# EAGLE board IR_and_skip_revB (EAGLE 5.11)
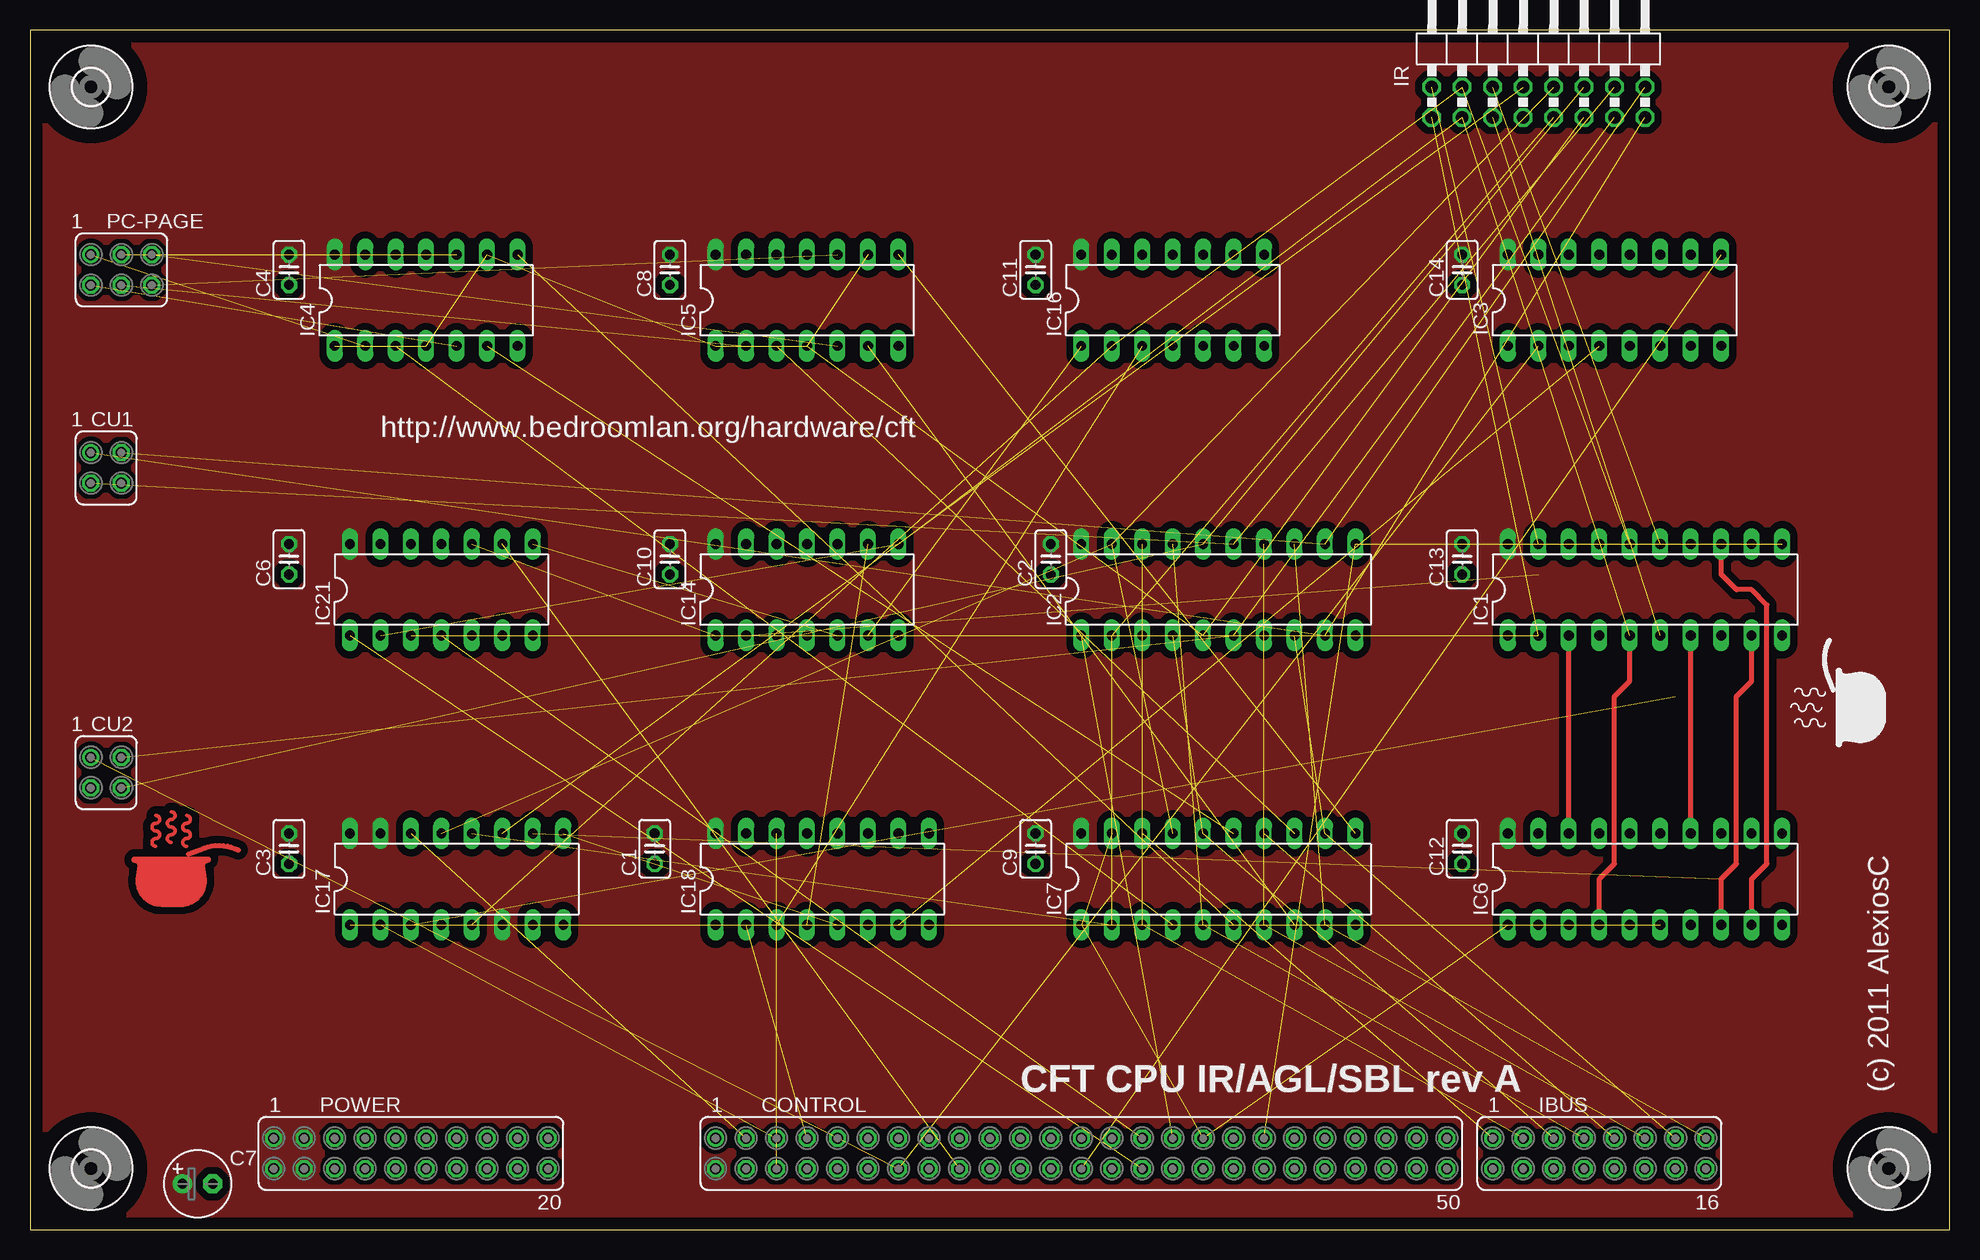
[diagram p0: board, top side]
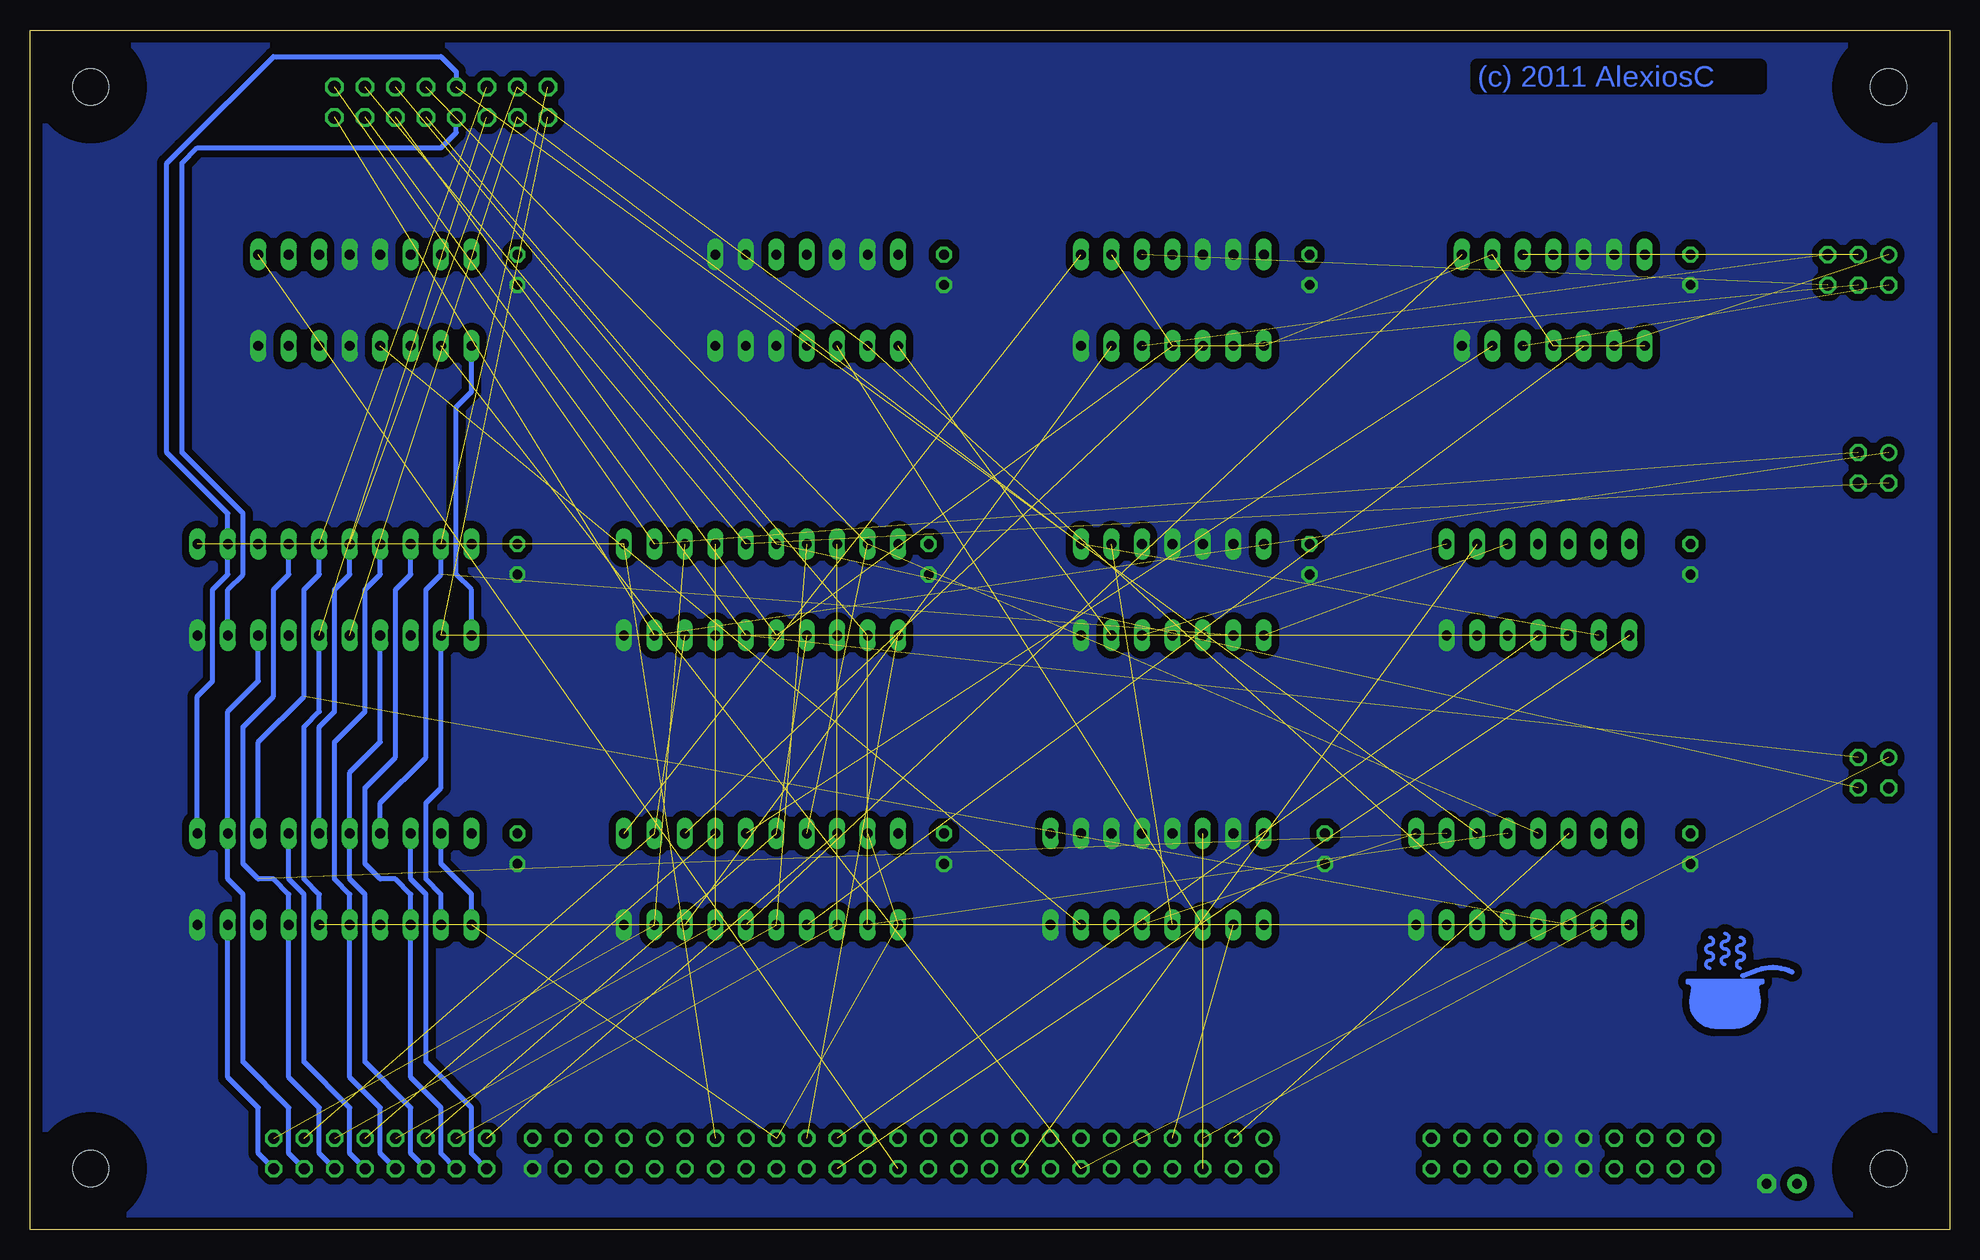
[diagram p1: board, bottom side, seen from below]

Size 160 x 100 mm. Coordinates in mm from the lower left corner, seen from the top.
Outline: 0,0 160,0 160,100 0,100 0,0
Copper layers (1*16): Top 0.035mm / dielectric 1.5mm / Bottom 0.035mm
Design rules "olimex-10mil": minimum track width 10mil, minimum drill 24mil, track to track 10mil, track to pad 10mil, pad to pad 10mil, via to via 10mil, smd to smd 10mil, copper to edge 40mil, drill to drill 10mil, minimum pad ring 10mil, minimum via ring 8mil, stop-mask expansion 0mil, vias tented up to drill 0mil, thermal gap 10mil
Net classes: 0 default: width 0.406 mm, clearance 0.305 mm; 1 Decoupling: width 1.27 mm

## Footprints (pad centres in the part's own frame; a part is rotated, then mirrored left to right if it is on the bottom)
C025-025X050 = drill 0.813 octagon: 1 -1.27,0; 2 1.27,0
E2,5-6 = drill 0.813 pad 1.6 round: + -1.27,0 | drill 0.813 pad 1.6 octagon: - 1.27,0
FE25-2 = drill 0.914 round: 1 -30.48,1.27; 41 20.32,1.27 | drill 0.914 octagon: 2 -30.48,-1.27; 3 -27.94,1.27; 4 -27.94,-1.27; 5 -25.4,1.27; 6 -25.4,-1.27; 7 -22.86,1.27; 8 -22.86,-1.27; 9 -20.32,1.27; 10 -20.32,-1.27; 11 -17.78,1.27; 12 -17.78,-1.27; 13 -15.24,1.27; 14 -15.24,-1.27; 15 -12.7,1.27; 16 -12.7,-1.27; 17 -10.16,1.27; 18 -10.16,-1.27; 19 -7.62,1.27; 20 -7.62,-1.27; 21 -5.08,1.27; 22 -5.08,-1.27; 23 -2.54,1.27; 24 -2.54,-1.27; 25 0,1.27; 26 0,-1.27; 27 2.54,1.27; 28 2.54,-1.27; 29 5.08,1.27; 30 5.08,-1.27; 31 7.62,1.27; 32 7.62,-1.27; 33 10.16,1.27; 34 10.16,-1.27; 35 12.7,1.27; 36 12.7,-1.27; 37 15.24,1.27; 38 15.24,-1.27; 39 17.78,1.27; 40 17.78,-1.27; 42 20.32,-1.27; 43 22.86,1.27; 44 22.86,-1.27; 45 25.4,1.27; 46 25.4,-1.27; 47 27.94,1.27; 48 27.94,-1.27; 49 30.48,1.27; 50 30.48,-1.27
FE02-2 = drill 0.914 round: 1 -1.27,1.27 | drill 0.914 octagon: 2 -1.27,-1.27; 3 1.27,1.27; 4 1.27,-1.27
3,0 = hole 3: 0,0
FE08-2 = drill 0.914 octagon: 1 -8.89,1.27; 2 -8.89,-1.27; 3 -6.35,1.27; 4 -6.35,-1.27; 5 -3.81,1.27; 6 -3.81,-1.27; 7 -1.27,1.27; 8 -1.27,-1.27; 9 1.27,1.27; 10 1.27,-1.27; 11 3.81,1.27; 12 3.81,-1.27; 13 6.35,1.27; 14 6.35,-1.27; 15 8.89,1.27; 16 8.89,-1.27
DIL20 = drill 0.813 long: 1 -11.43,-3.81; 2 -8.89,-3.81; 3 -6.35,-3.81; 4 -3.81,-3.81; 5 -1.27,-3.81; 6 1.27,-3.81; 7 3.81,-3.81; 8 6.35,-3.81; 9 8.89,-3.81; 10 11.43,-3.81; 11 11.43,3.81; 12 8.89,3.81; 13 6.35,3.81; 14 3.81,3.81; 15 1.27,3.81; 16 -1.27,3.81; 17 -3.81,3.81; 18 -6.35,3.81; 19 -8.89,3.81; 20 -11.43,3.81
DIL16 = drill 0.813 long: 1 -8.89,-3.81; 2 -6.35,-3.81; 3 -3.81,-3.81; 4 -1.27,-3.81; 5 1.27,-3.81; 6 3.81,-3.81; 7 6.35,-3.81; 8 8.89,-3.81; 9 8.89,3.81; 10 6.35,3.81; 11 3.81,3.81; 12 1.27,3.81; 13 -1.27,3.81; 14 -3.81,3.81; 15 -6.35,3.81; 16 -8.89,3.81
DIL14 = drill 0.813 long: 1 -7.62,-3.81; 2 -5.08,-3.81; 3 -2.54,-3.81; 4 0,-3.81; 5 2.54,-3.81; 6 5.08,-3.81; 7 7.62,-3.81; 8 7.62,3.81; 9 5.08,3.81; 10 2.54,3.81; 11 0,3.81; 12 -2.54,3.81; 13 -5.08,3.81; 14 -7.62,3.81
2X08/90 = drill 1.016 octagon: 1 -8.89,-6.35; 2 -8.89,-3.81; 3 -6.35,-6.35; 4 -6.35,-3.81; 5 -3.81,-6.35; 6 -3.81,-3.81; 7 -1.27,-6.35; 8 -1.27,-3.81; 9 1.27,-6.35; 10 1.27,-3.81; 11 3.81,-6.35; 12 3.81,-3.81; 13 6.35,-6.35; 14 6.35,-3.81; 15 8.89,-6.35; 16 8.89,-3.81
FE03-2 = drill 0.914 round: 1 -2.54,1.27 | drill 0.914 octagon: 2 -2.54,-1.27; 3 0,1.27; 4 0,-1.27; 5 2.54,1.27; 6 2.54,-1.27
FE10-2 = drill 0.914 octagon: 1 -11.43,1.27; 2 -11.43,-1.27; 3 -8.89,1.27; 4 -8.89,-1.27; 5 -6.35,1.27; 6 -6.35,-1.27; 7 -3.81,1.27; 8 -3.81,-1.27; 9 -1.27,1.27; 10 -1.27,-1.27; 11 1.27,1.27; 12 1.27,-1.27; 13 3.81,1.27; 14 3.81,-1.27; 15 6.35,1.27; 16 6.35,-1.27; 17 8.89,1.27; 18 8.89,-1.27; 19 11.43,1.27; 20 11.43,-1.27

## Placement (x,y rotation side)
C1  0.1uF  [C025-025X050]  52.07,31.75 90 top
C2  0.1uF  [C025-025X050]  85.09,55.88 90 top
C3  0.1uF  [C025-025X050]  21.59,31.75 90 top
C4  0.1uF  [C025-025X050]  21.59,80.01 90 top
C6  0.1uF  [C025-025X050]  21.59,55.88 90 top
C7  100uF  [E2,5-6]  13.97,3.81 0 top
C8  0.1uF  [C025-025X050]  53.34,80.01 90 top
C9  0.1uF  [C025-025X050]  83.82,31.75 90 top
C10  0.1uF  [C025-025X050]  53.34,55.88 90 top
C11  0.1uF  [C025-025X050]  83.82,80.01 90 top
C12  0.1uF  [C025-025X050]  119.38,31.75 90 top
C13  0.1uF  [C025-025X050]  119.38,55.88 90 top
C14  0.1uF  [C025-025X050]  119.38,80.01 90 top
CONTROL  [FE25-2]  87.63,6.35 0 top
CU1  [FE02-2]  6.35,63.5 0 top
CU2  [FE02-2]  6.35,38.1 0 top
H1  MOUNT-HOLE3.0  [3,0]  154.94,95.25 0 top
H2  MOUNT-HOLE3.0  [3,0]  154.94,5.08 0 top
H3  MOUNT-HOLE3.0  [3,0]  5.08,5.08 0 top
H4  MOUNT-HOLE3.0  [3,0]  5.08,95.25 0 top
IBUS  [FE08-2]  130.81,6.35 0 top
IC1  74HCT273N  [DIL20]  134.62,53.34 0 top
IC2  74HCT273N  [DIL20]  99.06,53.34 0 top
IC3  74HCT175N  [DIL16]  132.08,77.47 0 top
IC4  74HCT08N  [DIL14]  33.02,77.47 0 top
IC5  74HCT08N  [DIL14]  64.77,77.47 0 top
IC6  74HCT244N  [DIL20]  134.62,29.21 0 top
IC7  74HCT244N  [DIL20]  99.06,29.21 0 top
IC14  74HCT4075E  [DIL14]  64.77,53.34 0 top
IC16  74HCT266N  [DIL14]  95.25,77.47 0 top
IC17  74HCT253N  [DIL16]  35.56,29.21 0 top
IC18  74HCT253N  [DIL16]  66.04,29.21 0 top
IC21  74HCT08N  [DIL14]  34.29,53.34 0 top
IR  [2X08/90]  125.73,99.06 0 top
PC-PAGE  FE03-2  [FE03-2]  7.62,80.01 0 top
POWER  [FE10-2]  31.75,6.35 0 top
U$1  SIGNATUREPLANE  [SIGNATURE_PLANE]  8.89,26.67 0 top
U$2  SIGNATUREPLANE  [SIGNATURE_PLANE]  21.59,16.51 0 bottom
U$3  SIGNATURESILK  [SIGNATURE]  154.94,40.64 90 top

## Library data of the parts
C1-C4 C6-C14 = rcl
CONTROL IBUS = con-lsta
CU1 CU2 PC-PAGE U$1-U$3 = alexios
H1-H4 = holes
IC1-IC7 IC16-IC18 IC21 = 74xx-eu
IC14 = 40xx
IR = pinhead
POWER = con-lsta; OC_FARNELL: unknown; OC_NEWARK: unknown

## Nets
-ALU_ADD: CONTROL.23
-ALU_AND: CONTROL.22
-ALU_NOT: CONTROL.19
-ALU_OR: CONTROL.21
-ALU_ROLL: CONTROL.16
-ALU_XOR: CONTROL.20
-CLI: CONTROL.8
-CLL: CONTROL.10
-HALT: CONTROL.24
-IEND: CONTROL.42
-INCA: CONTROL.12
-INCDR: CONTROL.43
-INCPC: CONTROL.44
-INTS: CU1.4
-IO: CONTROL.46
-MEM: CONTROL.45
-R: CONTROL.48
-R_A: CONTROL.25
-R_AGL: CONTROL.33 IC6.1 IC6.19 IC7.1 IC7.19
-R_CS1: CONTROL.38
-R_CS2: CONTROL.40
-R_DR: CONTROL.17
-R_PC: CONTROL.15
-RESET: CONTROL.31 IC1.1 IC2.1 IC3.1
-RSTHOLD: CONTROL.4
-SKIP: CONTROL.14 CU2.1 IC3.2
-STI: CONTROL.9
-W: CONTROL.47
-W_A: CONTROL.41
-W_DR: CONTROL.39
-W_IR: CONTROL.37 IC1.11 IC2.11
-W_MAR: CONTROL.32
-W_PC: CONTROL.35
AINDEX: CU2.2
CLOCK: CONTROL.26 IC3.9
CLOCK2: CONTROL.28
CLOCK4: CONTROL.27
CLOCK14: CONTROL.36
CPL: CONTROL.11
F_L: CONTROL.18 IC21.9
F_NEG: CONTROL.30 IC21.1
F_ZERO: CONTROL.29 IC21.4
GND: C1.1 C2.1 C3.1 C4.1 C6.1 C7.- C8.1 C9.1 C10.1 C11.1 C12.1 C13.1 C14.1 CONTROL.50 IC1.10 IC2.10 IC3.5 IC3.8 IC3.12 IC3.13 IC4.7 IC4.12 IC4.13 IC5.7 IC5.12 IC5.13 IC6.10 IC7.10 IC14.7 IC14.11 IC14.12 IC14.13 IC16.5 IC16.6 IC16.7 IC16.8 IC16.9 IC16.12 IC16.13 IC17.8 IC18.8 IC18.10 IC18.11 IC18.12 IC18.13 IC18.15 IC21.7 POWER.9 POWER.10 POWER.11 POWER.12
GUARDPULSE: CONTROL.34
IBUS0: IBUS.2 IC1.3 IC6.18
IBUS1: IBUS.4 IC1.18 IC6.3
IBUS2: IBUS.6 IC1.4 IC6.16
IBUS3: IBUS.8 IC1.17 IC6.5
IBUS4: IBUS.10 IC1.7 IC6.14
IBUS5: IBUS.12 IC1.14 IC6.7
IBUS6: IBUS.14 IC1.8 IC6.12
IBUS7: IBUS.16 IC1.13 IC6.9
IBUS8: IBUS.1 IC2.3 IC7.18
IBUS9: IBUS.3 IC2.18 IC7.3
IBUS10: IBUS.5 IC2.4 IC7.16
IBUS11: IBUS.7 IC2.17 IC7.5
IBUS12: IBUS.9 IC2.7 IC7.14
IBUS13: IBUS.11 IC2.14 IC7.7
IBUS14: IBUS.13 IC2.8 IC7.12
IBUS15: IBUS.15 IC2.13 IC7.9
IR0: IC1.2 IC6.2 IC14.1 IC21.10 IR.1
IR1: IC1.19 IC6.17 IC14.2 IC21.5 IR.2
IR2: IC1.5 IC6.4 IC14.8 IC21.2 IR.3
IR3: IC1.16 IC6.15 IC16.2 IC17.5 IR.4
IR4: IC1.6 IC6.6 IC17.4 IR.5
IR5: IC1.15 IC6.13 IC17.3 IR.6
IR6: IC1.9 IC6.8 IC17.10 IR.7
IR7: IC1.12 IC6.11 IC17.11 IR.8
IR8: IC2.2 IC7.2 IC17.12 IR.9
IR9: IC2.19 IC7.17 IC17.13 IR.10
IR10: IC2.5 IC4.1 IC4.4 IC4.9 IC5.1 IC5.4 IC5.9 IR.11
IR11: CU2.4 IC2.16 IR.12
IR12: CU2.3 IC2.6 IR.13
IR13: CU1.2 IC2.15 IR.14
IR14: CU1.1 IC2.9 IR.15
IR15: CU1.3 IC2.12 IR.16
OP1_BRANCH: IC16.3 IC18.3
OP2_ROLL: IC14.9 IC18.4
OP_IF0: CONTROL.3 IC17.14
OP_IF1: CONTROL.5 IC17.2
OP_IF2: CONTROL.6 IC18.14
OP_IF3: CONTROL.7 IC18.2
PAGE0: IC4.3 IC7.4
PAGE1: IC4.6 IC7.15
PAGE2: IC4.8 IC7.6
PAGE3: IC5.3 IC7.13
PAGE4: IC5.6 IC7.8
PAGE5: IC5.8 IC7.11
PC10: IC4.2 PC-PAGE.1
PC11: IC4.5 PC-PAGE.2
PC12: IC4.10 PC-PAGE.3
PC13: IC5.2 PC-PAGE.4
PC14: IC5.5 PC-PAGE.5
PC15: IC5.10 PC-PAGE.6
RSTHOLD: IC17.1 IC18.1
SKIP0: IC3.4 IC18.7
SL: IC14.5 IC21.8
SN: IC14.3 IC21.3
SX: IC14.6 IC16.1
SZ: IC14.4 IC21.6
VCC: C1.2 C2.2 C3.2 C4.2 C6.2 C7.+ C8.2 C9.2 C10.2 C11.2 C12.2 C13.2 C14.2 CONTROL.2 IC1.20 IC2.20 IC3.16 IC4.14 IC5.14 IC6.20 IC7.20 IC14.14 IC16.14 IC17.6 IC17.15 IC17.16 IC18.16 IC21.14 POWER.1 POWER.2 POWER.3 POWER.4
YA: IC17.7 IC18.6
YB: IC17.9 IC18.5

## Tracks (layer width: path | path; a pad name or v marks a point on that pad's centre or on a via)
-R_AGL  (3 unrouted)
  Bottom 0.406: IC6.19 125.73,30.48 123.19,27.94 IC6.1
-RESET  (2 unrouted)
  Bottom 0.406: IC1.1 123.19,53.34 124.46,54.61 124.46,68.58 123.19,69.85 IC3.1
-SKIP  (2 unrouted)
-W_IR  (2 unrouted)
CLOCK  (1 unrouted)
F_L  (1 unrouted)
F_NEG  (1 unrouted)
F_ZERO  (1 unrouted)
GND
  pour Bottom (isolate 0.508, no thermals): 30.48,8.89 29.21,7.62 29.21,5.08 30.48,3.81 33.02,3.81 34.29,5.08 34.29,7.62 33.02,8.89
  pour Bottom (isolate 0.61, no thermals): 0,100.33 0,0 160.02,0 160.02,100.33
IBUS0
  Top 0.406: IC6.18 IC1.3
  Bottom 0.406: IBUS.2 123.19,6.35 123.19,10.16 127,13.97 127,27.94 128.27,29.21 IC6.18
IBUS1
  Bottom 0.406: IBUS.4 125.73,6.35 125.73,10.16 128.27,12.7 IC6.3 128.27,27.94 129.54,29.21 130.81,29.21 132.08,30.48 132.08,36.83 129.54,39.37 129.54,53.34 128.27,54.61 IC1.18
IBUS2
  Bottom 0.406: IBUS.6 128.27,6.35 128.27,10.16 132.08,13.97 132.08,27.94 133.35,29.21 IC6.16 133.35,38.1 130.81,40.64 IC1.4
IBUS3
  Bottom 0.406: IBUS.8 130.81,6.35 130.81,10.16 133.35,12.7 IC6.5 133.35,27.94 134.62,29.21 134.62,40.64 132.08,43.18 132.08,53.34 130.81,54.61 IC1.17
IBUS4
  Top 0.406: IC6.14 IC1.7
  Bottom 0.406: IBUS.10 133.35,6.35 133.35,10.16 137.16,13.97 137.16,27.94 138.43,29.21 IC6.14
IBUS5
  Bottom 0.406: IBUS.12 135.89,6.35 135.89,10.16 138.43,12.7 IC6.7 138.43,27.94 139.7,29.21 140.97,29.21 142.24,30.48 142.24,41.91 139.7,44.45 139.7,53.34 138.43,54.61 IC1.14
IBUS6
  Bottom 0.406: IBUS.14 138.43,6.35 138.43,10.16 142.24,13.97 142.24,27.94 143.51,29.21 IC6.12 143.51,43.18 140.97,45.72 IC1.8
IBUS7
  Top 0.406: IC6.9 143.51,29.21 144.78,30.48 144.78,52.07 143.51,53.34 142.24,53.34 140.97,54.61 140.97,55.88 IC1.13
  Bottom 0.406: IBUS.16 140.97,6.35 140.97,10.16 143.51,12.7 IC6.9
IBUS8  (2 unrouted)
IBUS9  (2 unrouted)
IBUS10  (2 unrouted)
IBUS11  (2 unrouted)
IBUS12  (2 unrouted)
IBUS13  (2 unrouted)
IBUS14  (2 unrouted)
IBUS15  (2 unrouted)
IR0  (3 unrouted)
  Bottom 0.406: IC6.2 125.73,27.94 127,29.21 127,35.56 125.73,36.83 IC1.2
IR1  (3 unrouted)
  Bottom 0.406: IC6.17 130.81,35.56 127,39.37 127,53.34 125.73,54.61 IC1.19
IR2  (3 unrouted)
  Top 0.406: IC6.4 130.81,29.21 132.08,30.48 132.08,44.45 133.35,45.72 IC1.5
IR3  (3 unrouted)
  Bottom 0.406: IC6.15 135.89,41.91 134.62,43.18 134.62,53.34 133.35,54.61 IC1.16
IR4  (2 unrouted)
  Bottom 0.406: IC6.6 135.89,27.94 137.16,29.21 137.16,41.91 135.89,43.18 IC1.6
IR5  (2 unrouted)
  Bottom 0.406: IC6.13 140.97,40.64 137.16,44.45 137.16,53.34 135.89,54.61 IC1.15
IR6  (1 unrouted)
  Top 0.406: IC6.8 140.97,29.21 142.24,30.48 142.24,44.45 143.51,45.72 IC1.9
  Bottom 0.406: IC1.9 143.51,53.34 142.24,54.61 142.24,59.69 147.32,64.77 147.32,88.9 146.05,90.17 125.73,90.17 124.46,91.44 IR.7
IR7  (1 unrouted)
  Bottom 0.406: IC6.11 146.05,44.45 144.78,45.72 144.78,53.34 143.51,54.61 IC1.12 143.51,59.69 148.59,64.77 148.59,88.9 147.32,90.17 139.7,97.79 125.73,97.79 124.46,96.52 IR.8
IR8  (3 unrouted)
IR9  (3 unrouted)
IR10  (7 unrouted)
IR11  (2 unrouted)
IR12  (2 unrouted)
IR13  (2 unrouted)
IR14  (2 unrouted)
IR15  (2 unrouted)
OP1_BRANCH  (1 unrouted)
OP2_ROLL  (1 unrouted)
OP_IF0  (1 unrouted)
OP_IF1  (1 unrouted)
OP_IF2  (1 unrouted)
OP_IF3  (1 unrouted)
PAGE0  (1 unrouted)
PAGE1  (1 unrouted)
PAGE2  (1 unrouted)
PAGE3  (1 unrouted)
PAGE4  (1 unrouted)
PAGE5  (1 unrouted)
PC10  (1 unrouted)
PC11  (1 unrouted)
PC12  (1 unrouted)
PC13  (1 unrouted)
PC14  (1 unrouted)
PC15  (1 unrouted)
RSTHOLD  (1 unrouted)
SKIP0  (1 unrouted)
SL  (1 unrouted)
SN  (1 unrouted)
SX  (1 unrouted)
SZ  (1 unrouted)
VCC
  pour Top (isolate 0.508, no thermals): 20.32,8.89 19.05,7.62 19.05,5.08 20.32,3.81 22.86,3.81 24.13,5.08 24.13,7.62 22.86,8.89
  pour Top (isolate 0.61, rank 6, no thermals): 0,100.33 0,0 160.02,0 160.02,100.33
YA  (1 unrouted)
YB  (1 unrouted)

## Text on the board
Bottom: (c) 2011 AlexiosC
tNames: http://www.bedroomlan.org/hardware/cft | CFT CPU IR/AGL/SBL rev A | (c) 2011 AlexiosC
tValues: +12V | +5V | GND